# EAGLE board a2402-4069-overdrive (EAGLE 7.5.0)
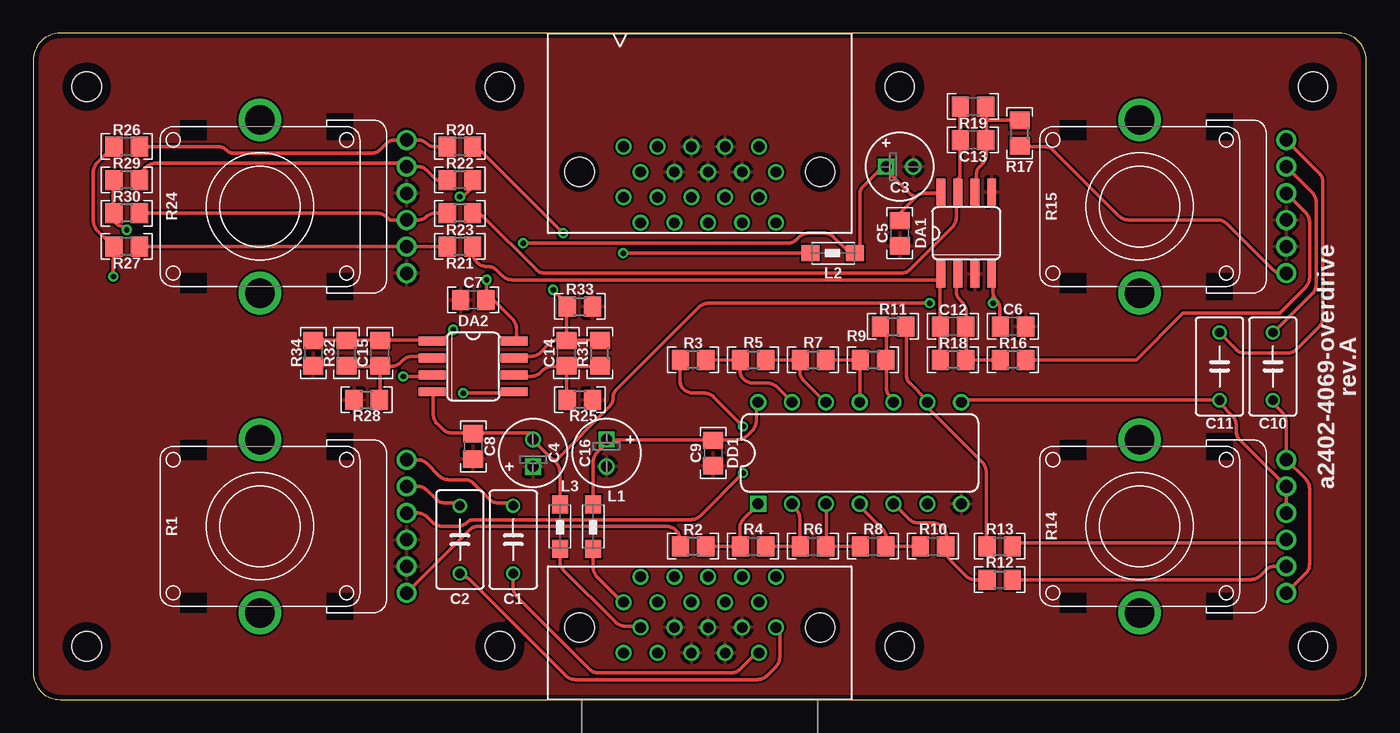
[diagram p0: board, top side]
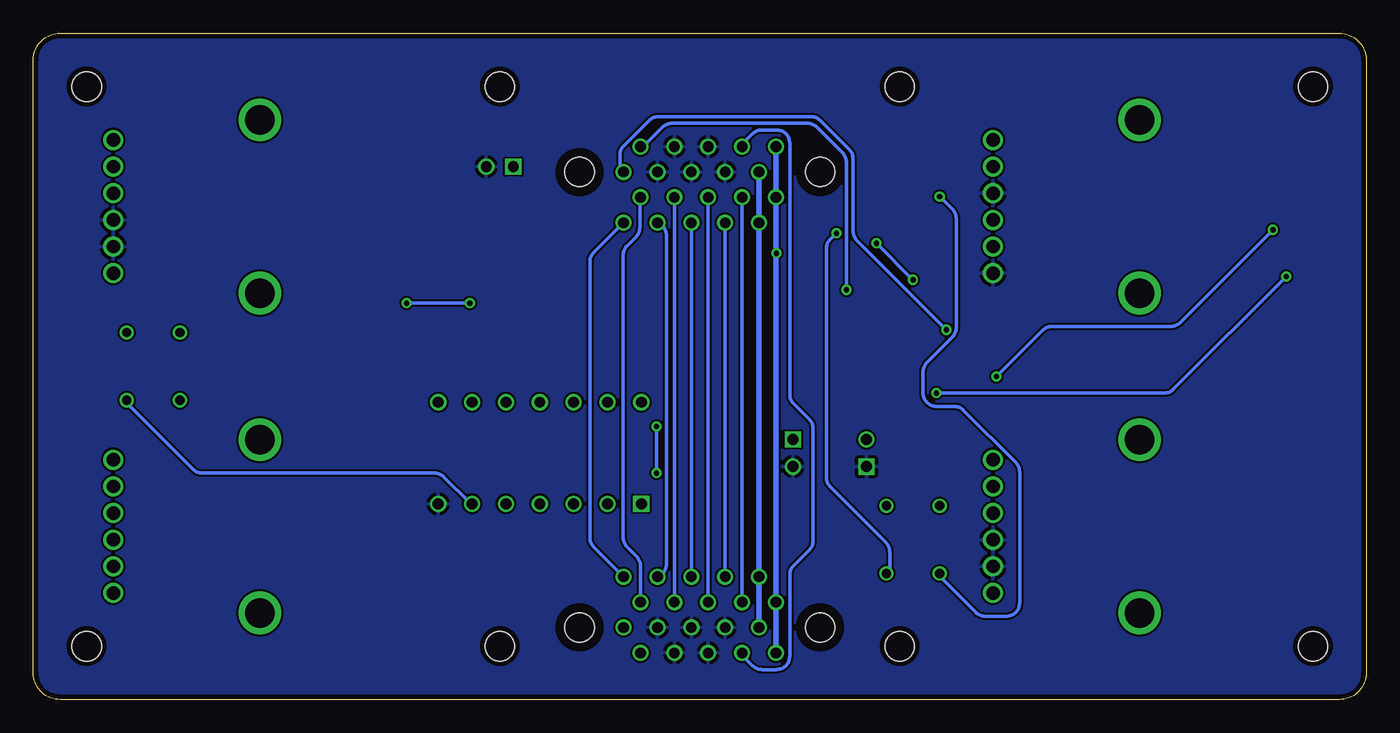
[diagram p1: board, bottom side, seen from below]

Size 100 x 50 mm. Coordinates in mm from the lower left corner, seen from the top.
Outline: 100,2 100,48 arc90 98,50 2,50 arc90 0,48 0,2 arc90 2,0 98,0 arc90 100,2
Copper layers (1*16): Top 0.0356mm / dielectric 1.5011mm / Bottom 0.0356mm
Design rules "LaenPCBOrder": minimum track width 6mil, minimum drill 13mil, track to track 6mil, track to pad 6mil, pad to pad 6mil, via to via 6mil, smd to smd 6mil, copper to edge 15mil, drill to drill 6mil, minimum pad ring 7mil, minimum via ring 7mil, stop-mask expansion 3mil, vias tented up to drill 0mil, thermal gap 10mil

## Footprints (pad centres in the part's own frame; a part is rotated, then mirrored left to right if it is on the bottom)
C050-035X075 = drill 0.7: 1 -2.54,0; 2 2.54,0
E2-5 = drill 0.813 square: + -1.016,0 | drill 0.813: - 1.016,0
C-0805 = smd 1.3 x 1.5: 1 -0.95,0; 2 0.95,0
SO-8 = smd 0.66 x 2.032: 1 -1.905,-3.073; 2 -0.635,-3.073; 3 0.635,-3.073; 4 1.905,-3.073; 5 1.905,3.073; 6 0.635,3.073; 7 -0.635,3.073; 8 -1.905,3.073
DIP-14 = drill 0.813 square: 1 -7.62,-3.81 | drill 0.813: 2 -5.08,-3.81; 3 -2.54,-3.81; 4 0,-3.81; 5 2.54,-3.81; 6 5.08,-3.81; 7 7.62,-3.81; 8 7.62,3.81; 9 5.08,3.81; 10 2.54,3.81; 11 0,3.81; 12 -2.54,3.81; 13 -5.08,3.81; 14 -7.62,3.81
1206 = smd 1.35 x 1.2: 1 -1.7,0; 2 1.65,0
ST2-BOARD-50 = drill 0.8: A+15 44.285,7.31; A+15' 44.285,37.69; A-15 45.555,9.215; A-15' 45.555,35.785; ACV1 51.905,7.31; ACV1' 51.905,37.69; ACV2 53.175,9.215; ACV2' 53.175,35.785; ALFBK 49.365,7.31; ALFBK' 49.365,37.69; ALMIX 46.825,7.31; ALMIX' 46.825,37.69; ARFBK 50.635,9.215; ARFBK' 50.635,35.785; ARMIX 48.095,9.215; ARMIX' 48.095,35.785; ASMBCLK 55.715,9.215; ASMBCLK' 55.715,35.785; ASMBDAT 54.445,7.31; ASMBDAT' 54.445,37.69; B4 48.095,5.405; B4' 48.095,39.595; B5 49.365,3.5; B5' 49.365,41.5; B6 50.635,5.405; B6' 50.635,39.595; B7 51.905,3.5; B7' 51.905,41.5; B8 53.175,5.405; B8' 53.175,39.595; B+15 44.285,3.5; B+15' 44.285,41.5; B-15 45.555,5.405; B-15' 45.555,39.595; BINL 54.445,3.5; BINR 55.715,5.405; BOUTL' 54.445,41.5; BOUTR' 55.715,39.595; BSENSE 46.825,3.5; BSENSE' 46.825,41.5 | hole 2.2: 4,4; 4,46; 96,4; 96,46; 35,46; 65,46; 65,4; 35,4; 59.025,5.405; 40.975,5.405; 40.975,39.595; 59.025,39.595
RV11-DUAL = drill 1: 1 -1,-11; 1' -3,-11; 2 1,-11; 2' -5,-11; 3 3,-11; 3' 5,-11 | drill 2.2: S1 -6.5,0; S2 6.5,0
R-0805 = smd 1.3 x 1.5: 1 -0.95,0; 2 0.95,0

## Placement (x,y rotation side)
C1  330N(FILM)  [C050-035X075]  36,12 270 top
C2  330N(FILM)  [C050-035X075]  32,12 270 top
C3  10U/35V  [E2-5]  65,40 0 top
C4  10U/35V  [E2-5]  37.5,18.5 90 top
C5  100N  [C-0805]  65,35 90 top
C6  100N  [C-0805]  73.5,28 0 top
C7  100N  [C-0805]  33,30 0 top
C8  100N  [C-0805]  33,19 270 top
C9  100N  [C-0805]  51,18.5 90 top
C10  330N(FILM)  [C050-035X075]  93,25 90 top
C11  330N(FILM)  [C050-035X075]  89,25 90 top
C12  22P  [C-0805]  69,28 180 top
C13  22P  [C-0805]  70.5,42 180 top
C14  22P  [C-0805]  40,26 90 top
C15  22P  [C-0805]  26,26 90 top
C16  10U/35V  [E2-5]  43,18.5 270 top
DA1  NJM2068M  [SO-8]  70,35 0 top
DA2  NJM2068M  [SO-8]  33,25 270 top
DD1  CD4069UBE  [DIP-14]  62,18.5 0 top
L1  BLM31AJ601SN1L  [1206]  42,13 90 top
L2  BLM31AJ601SN1L  [1206]  60,33.5 0 top
L3  BLM31AJ601SN1L  [1206]  39.5,13 90 top
O1  [EMPTY]  41,-96 0 top  (outside the outline)
O2  450-AA150(15MM,D,BLACK)  [EMPTY]  -8,-98 0 top  (outside the outline)
O3  450-CP157(15MM,WHITE/BLACK)  [EMPTY]  -12,-106 0 top  (outside the outline)
O4  450-AA150(15MM,D,BLACK)  [EMPTY]  -9,-100 0 top  (outside the outline)
O5  450-CP153(15MM,BLUE/WHITE)  [EMPTY]  -15,-112 0 top  (outside the outline)
O6  450-AA150(15MM,D,BLACK)  [EMPTY]  -10,-102 0 top  (outside the outline)
O7  450-CP157(15MM,WHITE/BLACK)  [EMPTY]  -13,-108 0 top  (outside the outline)
O8  450-AA150(15MM,D,BLACK)  [EMPTY]  -11,-104 0 top  (outside the outline)
O9  450-CP155(15MM,GRAY/WHITE)  [EMPTY]  -14,-110 0 top  (outside the outline)
PCB1  rev.A  [ST2-BOARD-50]  0,0 0 top
R1  2*A10K  [RV11-DUAL]  17,13 90 top
R2  10K  [R-0805]  49.5,11.5 180 top
R3  10K  [R-0805]  49.5,25.5 180 top
R4  100K  [R-0805]  54,11.5 0 top
R5  100K  [R-0805]  54,25.5 0 top
R6  10K  [R-0805]  58.5,11.5 0 top
R7  10K  [R-0805]  58.5,25.5 0 top
R8  100K  [R-0805]  63,11.5 0 top
R9  100K  [R-0805]  63,25.5 0 top
R10  10K  [R-0805]  67.5,11.5 0 top
R11  10K  [R-0805]  64.5,28 0 top
R12  10K  [R-0805]  72.5,9 0 top
R13  10K  [R-0805]  72.5,11.5 0 top
R14  2*A1M  [RV11-DUAL]  83,13 90 top
R15  2*A10K  [RV11-DUAL]  83,37 90 top
R16  10K  [R-0805]  73.5,25.5 180 top
R17  10K  [R-0805]  74,42.5 90 top
R18  10K  [R-0805]  69,25.5 180 top
R19  10K  [R-0805]  70.5,44.5 180 top
R20  10K  [R-0805]  32,41.5 180 top
R21  10K  [R-0805]  32,34 180 top
R22  10K  [R-0805]  32,39 180 top
R23  10K  [R-0805]  32,36.5 180 top
R24  2*B20K(CD)  [RV11-DUAL]  17,37 90 top
R25  10K  [R-0805]  41,22.5 180 top
R26  10K  [R-0805]  7,41.5 180 top
R27  10K  [R-0805]  7,34 180 top
R28  10K  [R-0805]  25,22.5 0 top
R29  10K  [R-0805]  7,39 180 top
R30  10K  [R-0805]  7,36.5 180 top
R31  15K  [R-0805]  42.5,26 90 top
R32  15K  [R-0805]  23.5,26 90 top
R33  100K  [R-0805]  41,29.5 0 top
R34  100K  [R-0805]  21,26 270 top
U1  FX2-20P-1.27DS  [EMPTY]  44,-96 0 top  (outside the outline)
U2  FX2-20S-1.27DS  [EMPTY]  47,-96 0 top  (outside the outline)

## Library data of the parts
C1 C2 C10 C11 = capacitors; MOUSER: 505-MKS2.33/63/10
C3 C4 C16 = capacitors-electrolytic; MOUSER: 647-USW1V100MDD
C5-C9 = capacitors; MOUSER: 77-VJ0805V104MXBPBC
C12-C15 = capacitors; MOUSER: 77-VJ0805A220GXACBC
DA1 DA2 = ic-jrc; MOUSER: 513-NJM2068M
DD1 = ic-logic
L1-L3 = inductors; MOUSER: 81-BLM31AJ601SN1L
O1 = text
O2 O4 O6 O8 = hardware; MOUSER: 450-AA150
O3 O7 = hardware; MOUSER: 450-CP157
O5 = hardware; MOUSER: 450-CP153
O9 = hardware; MOUSER: 450-CP155
PCB1 = module-footprints
R1 R15 = potentiometers; MOUSER: 688-RK12L12C0A0E
R2 R3 R6 R7 R10-R13 R16-R23 R25-R30 = resistors; MOUSER: 660-RK73H2ATTD1002F
R4 R5 R8 R9 R33 R34 = resistors; MOUSER: 660-RK73H2ATTD1003F
R14 = potentiometers; MOUSER: 317-2102F-1M
R24 = potentiometers; MOUSER: 688-RK12L1230C1M
R31 R32 = resistors; MOUSER: 660-RK73H2ATTD1502F
U1 = hardware; MOUSER: 798-FX2-20P-1.27DS71
U2 = hardware; MOUSER: 798-FX2-20S-1.27DS71

## Nets
+15V [power]: C3.+ C5.2 C7.2 DA1.8 DA2.8 L2.2
-15V [power]: C4.- C6.1 C8.1 DA1.4 DA2.4 L3.2
FBK_LEFT: PCB1.ALFBK PCB1.ALFBK'
FBK_RIGHT: PCB1.ARFBK PCB1.ARFBK'
GND: C3.- C4.+ C5.1 C6.2 C7.1 C8.2 C9.1 C16.- DA1.3 DA1.5 DD1.7 PCB1.B4 PCB1.B4' PCB1.B5 PCB1.B5' PCB1.B6 PCB1.B6' PCB1.B7 PCB1.B7' PCB1.B8 PCB1.B8' R1.1 R1.1' R15.1 R15.1' R24.2 R24.2' R25.1 R28.1 R33.2 R34.2
LMIX: PCB1.ALMIX PCB1.ALMIX'
N$1: C9.2 C16.+ DD1.14 L1.2
N$2: R12.2 R14.1'
N$3: R13.2 R14.1
N$4: C1.2 PCB1.BINL R20.1
N$5: C1.1 R1.3'
N$6: DD1.1 R2.1 R4.1
N$7: DD1.2 R4.2 R6.1
N$8: DD1.3 R6.2 R8.1
N$9: DD1.4 R8.2 R10.1
N$10: DD1.5 R10.2 R12.1
N$11: C10.1 DD1.6 R14.2' R14.3'
N$12: C10.2 R15.3
N$13: R15.2 R16.1
N$14: C12.1 DA1.2 R16.2 R18.1
N$15: R1.2' R2.2
N$16: PCB1.BSENSE PCB1.BSENSE'
N$17: C12.2 DA1.1 R18.2 R21.1
N$18: C2.1 R1.3
N$19: C2.2 PCB1.BINR R22.1
N$20: R1.2 R3.2
N$21: DD1.13 R3.1 R5.1
N$22: DD1.12 R5.2 R7.1
N$23: DD1.11 R7.2 R9.1
N$24: DD1.10 R9.2 R11.1
N$26: DD1.9 R11.2 R13.1
N$27: C11.1 DD1.8 R14.2 R14.3
N$28: C14.2 DA2.7 PCB1.BOUTL' R31.2 R33.1
N$29: C11.2 R15.3'
N$30: R15.2' R17.1
N$31: C13.1 DA1.6 R17.2 R19.1
N$32: C13.2 DA1.7 R19.2 R23.1
N$33: R20.2 R24.3' R26.1
N$34: R22.2 R24.3 R29.1
N$35: C15.1 DA2.2 R28.2 R32.1
N$36: L3.1 PCB1.A-15 PCB1.A-15' PCB1.B-15 PCB1.B-15'
N$37: C15.2 DA2.1 PCB1.BOUTR' R32.2 R34.1
N$38: PCB1.ASMBDAT PCB1.ASMBDAT'
N$39: DA2.3 R29.2 R30.2
N$40: R23.2 R24.1 R30.1
N$41: PCB1.ACV1 PCB1.ACV1'
N$42: PCB1.ACV2 PCB1.ACV2'
N$43: PCB1.ASMBCLK PCB1.ASMBCLK'
N$61: DA2.5 R26.2 R27.2
N$64: C14.1 DA2.6 R25.2 R31.1
N$65: R21.2 R24.1' R27.1
P+15V: L1.1 L2.1 PCB1.A+15 PCB1.A+15' PCB1.B+15 PCB1.B+15'
RMIX: PCB1.ARMIX PCB1.ARMIX'

## Tracks (layer width: path | path; a pad name or v marks a point on that pad's centre or on a via)
+15V  (via drill 0.4)
  Top 0.254: 66.25,37.75 64.75,36.25 64.75,36 65,35.75 C5.2 | 66.25,37.75 arc-45 66.85,38 67.75,38 68,37.75 68.25,38 DA1.8 | 66.25,37.75 arc-45 65.82,37.93 63.75,40 | 63.75,40 62.29,38.54 arc45 62,37.84 62,33.5 L2.2 61.25,33.5 60.04,34.71 arc45 59.34,35 58.16,35 arc45 57.46,34.71 57.29,34.54 arc-45 56.59,34.25 v36.75,34.25 | 63.75,40 C3.+ | 34,30.25 34.25,30.25 35.96,28.54 arc-45 36.25,27.84 36.25,27.25 36.5,27 36.25,26.75 DA2.8 | 34,30.25 33.75,30 C7.2 34,30.25 | 34,30.25 v34,31.5
  Bottom 0.254: v34,31.5 v36.75,34.25
-15V  (via drill 0.4)
  Top 0.254: 72.08,30.28 arc23 72.29,29.96 arc-45 72.5,29.46 72.5,28 C6.1 | 72.08,30.28 arc-23 72,30.66 72,31.75 DA1.4 | 33,20 31.41,20 arc-45 30.71,20.29 30.29,20.71 arc-45 30,21.41 30,22.75 30.25,23 30,23.25 DA2.4 | 39,18 37.5,19.5 C4.- 37.5,19.75 37.25,20 33,20 | 39,18 39.21,17.79 arc-45 39.5,17.09 L3.2 | 33,20 C8.1 | v67.25,29.75 50.66,29.75 arc45 49.96,29.46 43.74,23.24 arc45 43.5,22.66 arc-45 43.21,21.96 39.25,18 39,18 | v72,29.75 72,30.17 arc-68 72.08,30.28
  Bottom 0.254: v72,29.75 v67.25,29.75
FBK_LEFT
  Bottom 0.254: PCB1.ALFBK' PCB1.ALFBK
FBK_RIGHT
  Bottom 0.254: PCB1.ARFBK' PCB1.ARFBK
GND
  pour Bottom: 98,0 2,0 arc-90 0,2 0,48 arc-90 2,50 98,50 arc-90 100,48 100,2 arc-90
  pour Top: 98,0 2,0 arc-90 0,2 0,48 arc-90 2,50 98,50 arc-90 100,48 100,2 arc-90
LMIX
  Bottom 0.254: PCB1.ALMIX' PCB1.ALMIX
N$1
  Top 0.254: L1.2 42,17.84 arc-45 42.29,18.54 43,19.25 43,19.5 | DD1.14 54.25,22.25 54.25,20.91 arc-45 53.96,20.21 53.54,19.79 arc-45 52.84,19.5 51,19.5 | 51,19.5 C9.2 | 43,19.5 51,19.5 | 43,19.5 C16.+
N$2
  Top 0.254: R12.2 73.25,9 73.5,8.75 73.75,9 91.34,9 arc45 92.04,9.29 92.46,9.71 arc-45 93.16,10 R14.1'
N$3
  Top 0.254: R13.2 73.25,11.5 73.5,11.75 93.75,11.75 R14.1
N$4  (via drill 0.4)
  Top 0.254: PCB1.BINL 54.25,3.5 53.04,2.29 arc-45 52.34,2 42.41,2 arc-45 41.71,2.29 36.29,7.71 arc-45 36,8.41 C1.2 | v39.75,35 33.25,41.5 R20.1
  Bottom 0.254: C1.2 36,9.5 35.75,9.75 35.75,11.09 arc-45 36.04,11.79 40.21,15.96 arc45 40.5,16.66 40.5,33.84 arc45 40.21,34.54 v39.75,35
N$5
  Top 0.254: R1.3' 28.84,18 arc-45 29.54,17.71 30.46,16.79 arc45 31.16,16.5 32.34,16.5 arc-45 33.04,16.21 34.21,15.04 arc45 34.91,14.75 36,14.75 C1.1
N$6
  Top 0.254: R2.1 50.25,11.5 50.5,11.75 50.75,11.5 52.75,11.5 53,11.75 | 53,11.75 53.25,11.5 R4.1 53,11.75 | 53,11.75 53,12.84 arc-45 53.29,13.54 54.25,14.5 DD1.1
N$7
  Top 0.254: 57.5,11.75 57.25,11.5 55.25,11.5 55,11.75 54.75,11.5 R4.2 | 57.5,11.75 57.75,11.5 R6.1 57.5,11.75 | 57.5,11.75 57.5,13.59 arc45 57.21,14.29 57,14.5 DD1.2
N$8
  Top 0.254: 59.5,11.75 59.75,11.5 61.75,11.5 62,11.75 62.25,11.5 R8.1 | 59.5,11.75 59.25,11.5 R6.2 59.5,11.75 | 59.5,11.75 59.5,14.5 DD1.3
N$9
  Top 0.254: 64,11.75 64.25,11.5 66.25,11.5 66.5,11.75 66.75,11.5 R10.1 | 64,11.75 63.75,11.5 R8.2 64,11.75 | 64,11.75 64,12.09 arc45 63.71,12.79 62.13,14.37 arc-45 DD1.4
N$10
  Top 0.254: 68.5,11.5 68.5,11.16 arc45 68.79,10.46 69.96,9.29 arc45 70.66,9 71.25,9 71.5,8.75 71.75,9 R12.1 | 68.5,11.5 68.5,12.25 arc90 67.5,13.25 66.41,13.25 arc-45 65.71,13.54 64.75,14.5 DD1.5 | 68.5,11.5 R10.2
N$11
  Top 0.254: R14.2' 95.46,9.46 arc45 95.75,10.16 95.75,15.84 arc45 95.46,16.54 R14.3' 94,20.84 arc45 93.71,21.54 93,22.25 C10.1
  Bottom 0.254: DD1.6 67.25,14.75 69.21,16.71 arc-45 69.91,17 87.34,17 arc45 88.04,17.29 93,22.25 C10.1
N$12
  Top 0.254: C10.2 93,27.5 95.96,30.46 arc45 96.25,31.16 96.25,37.34 arc45 95.96,38.04 R15.3
N$13
  Top 0.254: R15.2 95.46,36.54 arc-45 95.75,35.84 95.75,31.66 arc-45 95.46,30.96 93.5,29 86.25,29 82.75,25.5 74.75,25.5 74.5,25.25 74.25,25.5 R16.1
N$14
  Top 0.254: 70,28 70,25.5 R18.1 69.75,25.5 70,25.25 70.25,25.5 72.25,25.5 72.5,25.25 72.75,25.5 R16.2 | DA1.2 69.25,31.75 69.25,30.66 arc45 69.54,29.96 69.71,29.79 arc-45 70,29.09 70,28 | 70,28 C12.1
N$15
  Top 0.254: R1.2' 32.71,12.71 arc-45 33.41,13 47.5,13 arc-90 48.5,12 48.5,11.5 R2.2
N$16
  Bottom 0.254: PCB1.BSENSE' PCB1.BSENSE' arc28 46.57,41.93 46.04,42.46 arc45 45.34,42.75 44.25,42.75 arc90 43.25,41.75 43.25,22.91 arc-45 42.96,22.21 41.79,21.04 arc45 41.5,20.34 41.5,11.91 arc45 41.79,11.21 42.96,10.04 arc-45 43.25,9.34 43.25,3.25 arc90 44.25,2.25 45.34,2.25 arc45 46.04,2.54 46.75,3.25 PCB1.BSENSE
N$17
  Top 0.254: 68,31.5 35.91,31.5 arc-45 35.21,31.79 34.79,32.21 arc45 34.09,32.5 34,32.5 arc-90 33,33.5 33,34 R21.1 | 68,31.5 68.25,31.75 DA1.1 68,31.5 | 68,31.5 68,28 | 68,28 C12.2 | 68,28 68,25.5 R18.2
N$18
  Top 0.254: R1.3 28.84,16 arc-45 29.54,15.71 30.21,15.04 arc45 30.91,14.75 32,14.75 C2.1
N$19  (via drill 0.4)
  Top 0.254: PCB1.BINR 55.75,5.25 56,5 56,3.16 arc-45 55.71,2.46 55.04,1.79 arc-45 54.34,1.5 40.66,1.5 arc-45 39.96,1.79 32.79,8.96 arc45 32.09,9.25 32,9.25 C2.2 | v32,37.75 arc45 32.43,37.93 33,38.5 33,39 R22.1
  Bottom 0.254: C2.2 32,9.25 29.29,6.54 arc-45 28.59,6.25 27,6.25 arc-90 26,7.25 26,17.09 arc-45 26.29,17.79 30.21,21.71 arc-45 30.91,22 32.25,22 arc90 33.25,23 33.25,24.59 arc45 32.96,25.29 31.04,27.21 arc-45 30.75,27.91 30.75,36.09 arc-45 31.04,36.79 v32,37.75
N$20  (via drill 0.4)
  Top 0.254: v53.25,20.5 51.04,22.71 arc45 50.34,23 49.5,23 arc-90 48.5,24 48.5,25.5 R3.2 | v53.25,17 50.04,13.79 arc-45 49.34,13.5 33.04,13.5 arc45 32.54,13.29 arc-45 31.84,13 30.66,13 arc-45 29.96,13.29 29.54,13.71 arc45 28.84,14 R1.2
  Bottom 0.254: v53.25,20.5 v53.25,17
N$21
  Top 0.254: R3.1 50.25,25.5 50.5,25.75 50.75,25.5 52.75,25.5 53,25.75 53.25,25.5 R5.1 53,25.5 53,24.75 arc90 54,23.75 55.09,23.75 arc-45 55.79,23.46 56.75,22.5 DD1.13
N$22
  Top 0.254: R5.2 54.75,25.5 55,25.75 55.25,25.5 57.25,25.5 57.5,25.75 57.75,25.5 R7.1 57.5,25.5 57.5,24.66 arc45 57.79,23.96 59.25,22.5 DD1.12
N$23
  Top 0.254: R7.2 59.25,25.5 59.5,25.75 59.75,25.5 61.75,25.5 62,25.75 62.25,25.5 R9.1 62,25.5 DD1.11
N$24
  Top 0.254: 64,25.5 64,27.75 63.75,28 R11.1 | 64,25.5 64,23.41 arc45 64.29,22.71 64.5,22.5 DD1.10 | 64,25.5 R9.2
N$26
  Top 0.254: R11.2 65.5,28 65.5,24.41 arc45 65.79,23.71 67,22.5 DD1.9 67.25,22.25 67.25,21.75 71.21,17.79 arc-45 71.5,17.09 71.5,11.5 R13.1
N$27
  Top 0.254: R14.2 R14.3 90.54,19.46 arc-45 90.25,20.16 90.25,20.59 arc45 89.96,21.29 89,22.25 C11.1 89,22.5 69.98,22.5 arc56 DD1.8
N$28  (via drill 0.4)
  Top 0.254: 40,27 39.41,27 arc45 38.71,26.71 38.04,26.04 arc-45 37.34,25.75 36.25,25.75 DA2.7 | 40,27 42.5,27 R31.2 | 40,27 C14.2 | 40,27 40,29.5 R33.1 40.25,29.5 v39,30.75
  Bottom 0.254: v39,30.75 39,40.34 arc-45 39.29,41.04 41.21,42.96 arc-45 41.91,43.25 52.09,43.25 arc-45 52.79,42.96 54.25,41.5 PCB1.BOUTL'
N$29
  Top 0.254: R15.3' 96.46,39.54 arc-45 96.75,38.84 96.75,28.66 arc-45 96.46,27.96 94.79,26.29 arc-45 94.09,26 90.91,26 arc-45 90.21,26.29 89,27.5 C11.2
N$30
  Top 0.254: R15.2' 93.66,32 arc-45 92.96,32.29 89.54,35.71 arc45 88.84,36 82.16,36 arc-45 81.46,36.29 76.54,41.21 arc45 75.84,41.5 74,41.5 R17.1
N$31
  Top 0.254: R19.1 71.5,44.5 71.5,43.5 | 71.5,42 71.5,43.5 | 71.5,43.5 74,43.5 R17.2 | 71.5,42 71.5,40.91 arc-45 71.21,40.21 71.04,40.04 arc45 70.75,39.34 70.75,38.25 DA1.6 | 71.5,42 C13.1
N$32
  Top 0.254: R19.2 69.5,44.5 69.5,42 | 69.5,42 69.5,39.25 69.25,39 69.25,38.25 DA1.7 69.25,38 69.25,36.16 arc-45 68.96,35.46 65.79,32.29 arc-45 65.09,32 38.41,32 arc-45 37.71,32.29 33.79,36.21 arc45 33.09,36.5 R23.1 | 69.5,42 C13.2
N$33
  Top 0.254: R20.2 30.04,41.5 arc-45 29.54,41.71 arc45 28.84,42 R24.3' 27.16,42 arc45 26.46,41.71 26.04,41.29 arc-45 25.34,41 15.04,41 arc-45 14.54,41.21 arc45 13.84,41.5 8.25,41.5 8,41.75 7.75,41.5 R26.1
N$34
  Top 0.254: R22.2 30.25,39 29.54,39.71 arc45 28.84,40 R24.3 arc45 27.4,40.25 9.16,40.25 arc45 8.46,39.96 8,39.5 8,39 R29.1
N$35
  Top 0.254: 26,25 23.5,25 R32.1 | 26,25 26,22.5 R28.2 | 26,25 26.84,25 arc45 27.54,25.29 27.71,25.46 arc-45 28.41,25.75 29.75,25.75 DA2.2 | 26,25 C15.1
N$36
  Top 0.254: L3.1 39.5,10.41 arc45 39.79,9.71 43.71,5.79 arc45 44.41,5.5 45.5,5.5 PCB1.B-15
  Bottom 0.406: PCB1.B-15 PCB1.A-15 PCB1.A-15' PCB1.B-15'
N$37  (via drill 0.4)
  Top 0.254: 26,27 23.5,27 | R34.1 21,27 23.5,27 | 23.5,27 R32.2 | 26,27 C15.2 | 26,27 29.75,27 DA2.1 30,27 30.75,27 v31.5,27.75
  Bottom 0.254: v31.5,27.75 38.21,34.46 arc45 38.5,35.16 38.5,40.59 arc-45 38.79,41.29 40.96,43.46 arc-45 41.66,43.75 53.09,43.75 arc-45 53.79,43.46 55.71,41.54 arc-45 56,40.84 56,40 55.75,39.75 PCB1.BOUTR'
N$38
  Bottom 0.254: PCB1.ASMBDAT 54.45,10.03 arc-45 54.74,10.74 55.46,11.46 arc45 55.75,12.16 55.75,33.34 arc45 55.46,34.04 54.79,34.71 arc-45 54.5,35.41 54.5,37.63 PCB1.ASMBDAT'
N$39  (via drill 0.4)
  Top 0.254: R29.2 6,39 6,36.5 | v27.75,24.25 29.75,24.25 DA2.3 | v7,35.25 6.75,35.5 arc-90 6,36.25 6,36.5 | 6,36.5 R30.2
  Bottom 0.254: v27.75,24.25 24.29,27.71 arc45 23.59,28 14.66,28 arc-45 13.96,28.29 v7,35.25
N$40
  Top 0.254: R23.2 30.16,36.5 arc45 29.46,36.21 arc-45 28.96,36 R24.1 26.75,36 26.54,36.21 arc45 25.84,36.5 R30.1
N$41
  Bottom 0.254: PCB1.ACV1' PCB1.ACV1
N$42
  Bottom 0.254: PCB1.ACV2 53,9.25 52.79,9.46 arc-45 52.5,10.16 52.5,34.84 arc-45 52.79,35.54 53,35.75 PCB1.ACV2'
N$43
  Bottom 0.254: PCB1.ASMBCLK 57.96,11.46 arc45 58.25,12.16 58.25,32.84 arc45 57.96,33.54 PCB1.ASMBCLK'
N$61  (via drill 0.4)
  Top 0.254: 6,34 4.79,35.21 arc-45 4.5,35.91 4.5,39.59 arc-45 4.79,40.29 6,41.5 R26.2 | 6.25,34 R27.2 6,34 | v32.25,23 36,23 DA2.5 | 6,34 v6,31.75
  Bottom 0.254: v6,31.75 14.46,23.29 arc45 15.16,23 v32.25,23
N$64
  Top 0.254: 40,25 38.91,25 arc45 38.21,24.71 38.04,24.54 arc-45 37.34,24.25 36.25,24.25 DA2.6 | 40,25 42.5,25 R31.1 | R25.2 40,22.5 40,25 | 40,25 C14.1
N$65
  Top 0.254: R21.2 R24.1' R27.1
P+15V  (via drill 0.4)
  Top 0.254: L1.1 42,9.91 arc45 42.29,9.21 44.25,7.25 PCB1.A+15 | v44.25,33.5 L2.1
  Bottom 0.254: 44.25,32.75 44.28,32.75 | v44.25,33.5 44.28,33.5
  Bottom 0.406: PCB1.B+15' PCB1.A+15' 44.28,33.5 44.28,32.75 PCB1.A+15 PCB1.B+15
RMIX
  Bottom 0.254: PCB1.ARMIX PCB1.ARMIX'